# EAGLE board mm_robot_pcb_v3 (EAGLE 9.6.2)
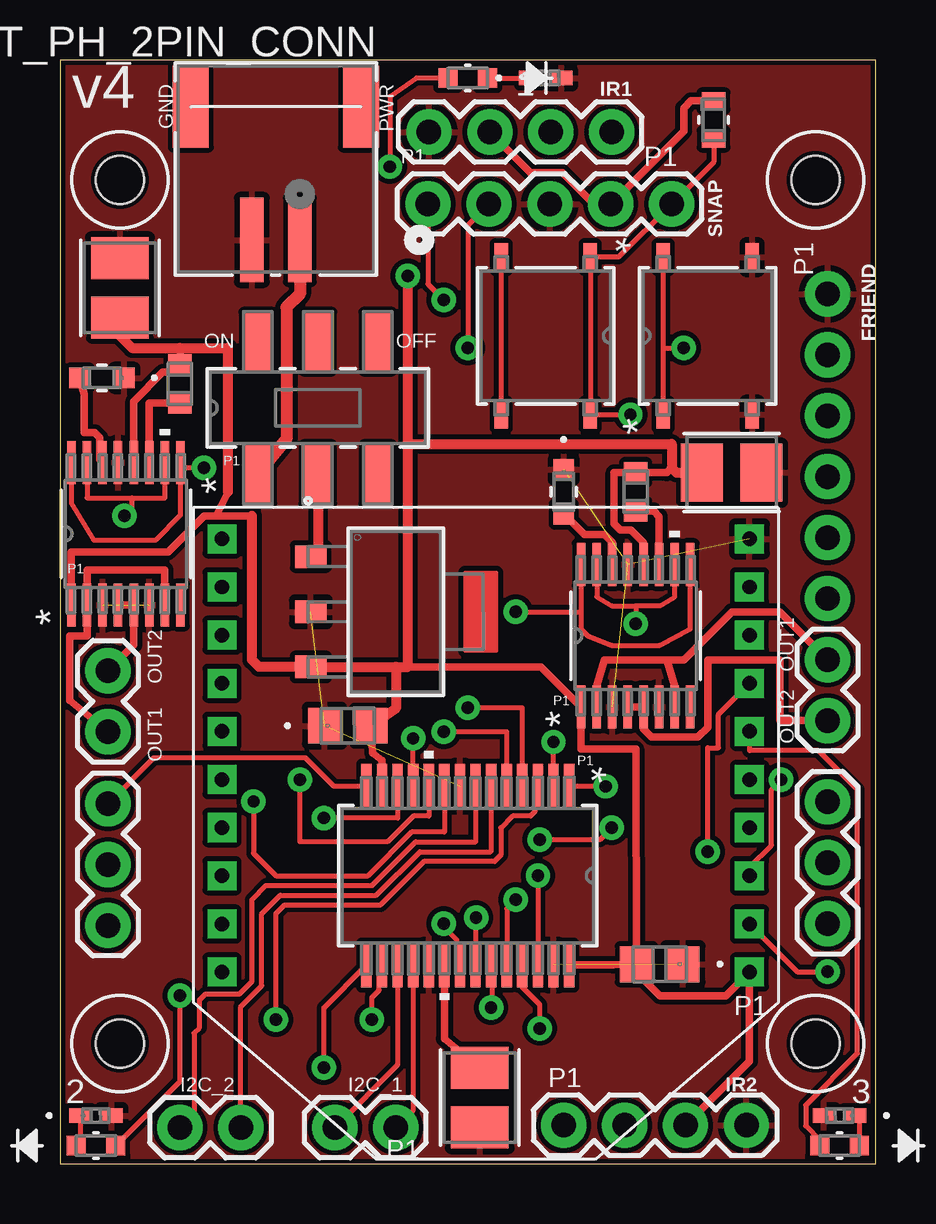
[diagram p0: board, top side]
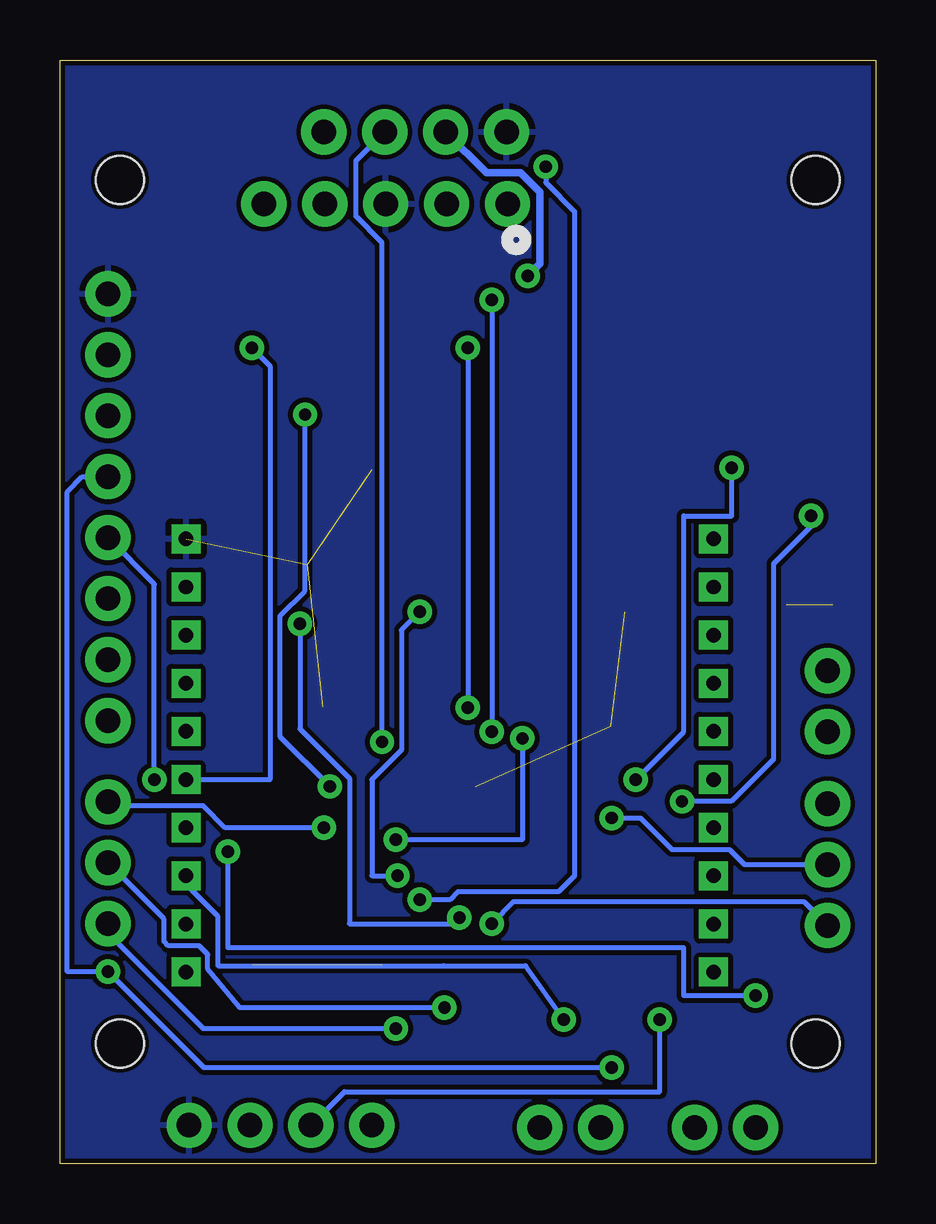
[diagram p1: board, bottom side, seen from below]

Size 34 x 46 mm. Coordinates in mm from the lower left corner, seen from the top.
Outline: 0,0 34,0 34,46 0,46 0,0
Copper layers (1*16): Top 0.035mm / dielectric 1.5mm / Bottom 0.035mm
Design rules "SparkFun": minimum track width 8mil, minimum drill 20mil, track to track 8mil, track to pad 8mil, pad to pad 8mil, via to via 8mil, smd to smd 8mil, copper to edge 8mil, drill to drill 8mil, minimum pad ring 12mil, minimum via ring 10mil, stop-mask expansion 4mil, vias tented up to drill 20mil, thermal gap 10mil
Holes 2 mm at 2.5,5 31.5,5 31.5,41 2.5,41

## Footprints (pad centres in the part's own frame; a part is rotated, then mirrored left to right if it is on the bottom)
CAP_CL10_SAM-M = smd 0.859 x 0.851: 1 -0.929,0; 2 0.929,0
CAP_TPS_B_AVX-M = smd 1.738 x 2.413: 1 -1.239,0; 2 1.239,0
CAP_01UF_0603_X7R_G_AVX = smd 0.864 x 0.965: 1 -0.8,0; 2 0.8,0
CAP_C2012X7R2A104K125AA_TDK-M = smd 1.397 x 1.499: 1 -0.965,0; 2 0.965,0
PW16_TEX-M = smd 1.778 x 0.356: 1 -2.972,2.275; 2 -2.972,1.625; 3 -2.972,0.975; 4 -2.972,0.325; 5 -2.972,-0.325; 6 -2.972,-0.975; 7 -2.972,-1.625; 8 -2.972,-2.275; 9 2.972,-2.275; 10 2.972,-1.625; 11 2.972,-0.975; 12 2.972,-0.325; 13 2.972,0.325; 14 2.972,0.975; 15 2.972,1.625; 16 2.972,2.275
1X06_NO_SILK = drill 1.016 pad 1.88: 1 0,0; 2 2.54,0; 3 5.08,0; 4 7.62,0; 5 10.16,0; 6 12.7,0
1X02 = drill 1.016 pad 1.88: 1 0,0; 2 2.54,0
1X04 = drill 1.016 pad 1.88: 1 0,0; 2 2.54,0; 3 5.08,0; 4 7.62,0
CONN_1769_ADA = smd 0.991 x 3.505: 1 0,0; 2 2,0 | smd 1.499 x 3.404: 3 -2.55,-5.55; 4 4.55,-5.55
LED_APT1608_KNB = smd 0.8 x 0.813: 1 -0.819,0; 2 0.819,0
SMT_FS-M = smd 1.156 x 0.559: 1 -3.283,1.854; 2 3.283,1.854; 3 -3.283,-1.854; 4 3.283,-1.854
1X03 = drill 1.016 pad 1.88: 1 0,0; 2 2.54,0; 3 5.08,0
RES0603_CRG_TYCO_TYC-M = smd 0.711 x 0.991: 1 -0.8,0; 2 0.8,0
RES_CRCW0402_VIS-M = smd 0.914 x 0.61: 1 -0.648,0; 2 0.648,0
1X05 = drill 1.016 pad 1.88: 1 0,0; 2 2.54,0; 3 5.08,0; 4 7.62,0; 5 10.16,0
SW_JS202011SCQN = smd 2.489 x 1.194: 1 -2.756,2.5; 2 -2.756,0; 3 -2.756,-2.5; 4 2.756,-2.5; 5 2.756,0; 6 2.756,2.5
SSOP28_MC_MCH-M = smd 1.867 x 0.432: 1 -3.727,4.225; 2 -3.727,3.575; 3 -3.727,2.925; 4 -3.727,2.275; 5 -3.727,1.625; 6 -3.727,0.975; 7 -3.727,0.325; 8 -3.727,-0.325; 9 -3.727,-0.975; 10 -3.727,-1.625; 11 -3.727,-2.275; 12 -3.727,-2.925; 13 -3.727,-3.575; 14 -3.727,-4.225; 15 3.727,-4.225; 16 3.727,-3.575; 17 3.727,-2.925; 18 3.727,-2.275; 19 3.727,-1.625; 20 3.727,-0.975; 21 3.727,-0.325; 22 3.727,0.325; 23 3.727,0.975; 24 3.727,1.625; 25 3.727,2.275; 26 3.727,2.925; 27 3.727,3.575; 28 3.727,4.225
SOT-223_ST_LIT-M = smd 0.94 x 1.321: 1 -2.299,-3.543; 2 0,-3.543; 3 2.299,-3.543
XB3-24APT-J = drill 0.6 square: 1 -10.998,6.02; 2 -10.998,4.013; 3 -10.998,2.007; 4 -10.998,0; 5 -10.998,-2.007; 6 -10.998,-4.013; 7 -10.998,-6.02; 8 -10.998,-8.026; 9 -10.998,-10.033; 10 -10.998,-12.04; 11 10.998,-12.04; 12 10.998,-10.033; 13 10.998,-8.026; 14 10.998,-6.02; 15 10.998,-4.013; 16 10.998,-2.007; 17 10.998,0; 18 10.998,2.007; 19 10.998,4.013; 20 10.998,6.02

## Placement (x,y rotation side)
C1_VINT1  2.2UF_0603  [CAP_CL10_SAM-M]  21,28 270 top
C2_VINT2  2.2UF_0603  [CAP_CL10_SAM-M]  1.75,32.75 180 top
C3_VM1  10UF_1210  [CAP_TPS_B_AVX-M]  28,28.8 0 top
C4_VCP1  0.01UF_0603  [CAP_01UF_0603_X7R_G_AVX]  24,28 90 top
C5_VM2  10UF_1210  [CAP_TPS_B_AVX-M]  2.5,36.5 90 top
C6_VCP2  0.01UF_0603  [CAP_01UF_0603_X7R_G_AVX]  5,32.5 90 top
C8  0.1UF_0805  [CAP_C2012X7R2A104K125AA_TDK-M]  12,18.25 0 top
C9  0.1UF_0805  [CAP_C2012X7R2A104K125AA_TDK-M]  25,8.31 180 top
C10  10UF_1210  [CAP_TPS_B_AVX-M]  17.5,2.75 90 top
DRIVER1  DRV8833PWPW16_TEX-M  [PW16_TEX-M]  24,22 90 top
DRIVER2  DRV8833PWPW16_TEX-M  [PW16_TEX-M]  2.75,26.25 90 top
FRIEND  [1X06_NO_SILK]  32,36.25 270 top
I2C_2  [1X02]  5,1.5 0 top
IR1  GP2Y0A60SZLF  [1X04]  23,43 180 top
IR2  GP2Y0A60SZLF  [1X04]  21,1.6 0 top
JST_PH_2PIN_CONN  1769  [CONN_1769_ADA]  10,38.5 180 top
LED1  APT1608-VN55  [LED_APT1608_KNB]  17,45.25 180 top
LED2  APT1608-VN55  [LED_APT1608_KNB]  1.5,0.75 0 top
LED3  APT1608-VN55  [LED_APT1608_KNB]  32.5,0.75 180 top
MOTOR1  [1X02]  32,21 270 top
MOTOR2  [1X02]  2,18 90 top
PCI-PINS4  [1X02]  14,1.5 180 top
PIC_PB  PUSH_BUTTON  [SMT_FS-M]  20.25,34.5 270 top
PIN-PINS1  455-1750-1-ND  [1X03]  2,15 270 top
PIN-PINS3  455-1750-1-ND  [1X03]  32,10 90 top
R2  10K_0603  [RES0603_CRG_TYCO_TYC-M]  27.25,43.5 90 top
R6  CRCW04021R00FKRES_CRCW0402_VIS-M  [RES_CRCW0402_VIS-M]  20.25,45.25 0 top
R7  CRCW04021R00FKRES_CRCW0402_VIS-M  [RES_CRCW0402_VIS-M]  1.5,2 0 top
R8  CRCW04021R00FKRES_CRCW0402_VIS-M  [RES_CRCW0402_VIS-M]  32.5,2 180 top
SNAP  [1X05]  25.5,40 180 top
SWITCH  JS202011SCQN  [SW_JS202011SCQN]  10.75,31.5 90 top
U1  PIC32  [SSOP28_MC_MCH-M]  17,12 270 top
VOLT_REG  LT1129IST-3.3TRPBFSOT-223_ST_LIT-M  [SOT-223_ST_LIT-M]  14,23 270 top
XBEE_PB  PUSH_BUTTON  [SMT_FS-M]  27,34.5 90 top
XBEE_ROBOT  XB3-24APT-J  [XB3-24APT-J]  17.75,14 180 top

## Library data of the parts
C1_VINT1 C2_VINT2 = micromouse; COPYRIGHT: Copyright (C) 2021 Ultra Librarian. All rights reserved.; MANUFACTURER_PART_NUMBER: CL10A225KP8NNNC; MFR_NAME: Samsung
C3_VM1 C5_VM2 C10 = micromouse; COPYRIGHT: Copyright (C) 2021 Ultra Librarian. All rights reserved.; MANUFACTURER_PART_NUMBER: TPSB106K016R0500; MFR_NAME: AVX Corporation
C4_VCP1 C6_VCP2 I2C_2 IR1 IR2 MOTOR1 MOTOR2 PCI-PINS4 SNAP XBEE_ROBOT = micromouse
C8 C9 = micromouse; COPYRIGHT: Copyright (C) 2021 Ultra Librarian. All rights reserved.; MANUFACTURER_PART_NUMBER: C2012X7R2A104K125AA; MFR_NAME: TDK
DRIVER1 DRIVER2 = DRV8833PW; COPYRIGHT: Copyright (C) 2021 Ultra Librarian. All rights reserved.; MANUFACTURER_PART_NUMBER: DRV8833PW; MFR_NAME: Texas Instruments
FRIEND = micromouse; PROD_ID: CONN-08437
JST_PH_2PIN_CONN = micromouse; COPYRIGHT: Copyright (C) 2021 Ultra Librarian. All rights reserved.; MANUFACTURER_PART_NUMBER: 1769; MFR_NAME: Adafruit Industries
LED1-LED3 = micromouse; COPYRIGHT: Copyright (C) 2021 Ultra Librarian. All rights reserved.; MANUFACTURER_PART_NUMBER: APT1608-VN55; MFR_NAME: Kingbright
PIC_PB XBEE_PB = micromouse; COPYRIGHT: Copyright (C) 2021 Ultra Librarian. All rights reserved.; MANUFACTURER_PART_NUMBER: PTS526 SK15 SMTR2 LFS; MFR_NAME: C&K
PIN-PINS1 PIN-PINS3 = micromouse; PROD_ID: XXX-00000
R2 = micromouse; COPYRIGHT: Copyright (C) 2021 Ultra Librarian. All rights reserved.; MANUFACTURER_PART_NUMBER: CRG0603F10K; MFR_NAME: TE Connectivity
R6-R8 = micromouse; COPYRIGHT: Copyright (C) 2021 Ultra Librarian. All rights reserved.; MANUFACTURER_PART_NUMBER: CRCW04021R00FK; MFR_NAME: Vishay
SWITCH = micromouse; COPYRIGHT: Copyright (C) 2021 Ultra Librarian. All rights reserved.; MANUFACTURER_PART_NUMBER: JS202011SCQN; MFR_NAME: C&K
U1 = micromouse; COPYRIGHT: Copyright (C) 2021 Ultra Librarian. All rights reserved.; MANUFACTURER_PART_NUMBER: PIC32MX170F256B-I/SS; MFR_NAME: Microchip
VOLT_REG = LT1129IST-3.3#TRPBF; COPYRIGHT: Copyright (C) 2021 Ultra Librarian. All rights reserved.; MANUFACTURER_PART_NUMBER: LT1129IST-3.3#TRPBF; MFR_NAME: Analog Devices / Linear Technology

## Nets
AN0: IR1.2 U1.2
AN1: IR2.2 U1.3
GND: C1_VINT1.1 C2_VINT2.1 C3_VM1.2 C5_VM2.2 C8.1 C9.1 C10.1 DRIVER1.3 DRIVER1.6 DRIVER1.13 DRIVER2.3 DRIVER2.6 DRIVER2.13 FRIEND.1 IR1.4 IR2.4 JST_PH_2PIN_CONN.2 R6.2 R7.2 R8.2 SNAP.3 U1.8 U1.19 U1.27 VOLT_REG.2 XBEE_PB.3 XBEE_PB.4 XBEE_ROBOT.10
M1OUT1: DRIVER1.2 DRIVER1.7 MOTOR1.1
M1OUT2: DRIVER1.4 DRIVER1.5 MOTOR1.2
M2OUT1: DRIVER2.2 DRIVER2.7 MOTOR2.1
M2OUT2: DRIVER2.4 DRIVER2.5 MOTOR2.2
MCLR: PIC_PB.1 PIC_PB.2 R2.1 SNAP.1 U1.1
PB_C7: PIC_PB.3 PIC_PB.4
R6: LED1.1 R6.1
R7: LED2.1 R7.1
R8: LED3.1 R8.1
RP12-AN12: PIN-PINS3.2 U1.23
RPA2-OC4: DRIVER2.10 DRIVER2.15 U1.9
RPA3-OC3: DRIVER2.9 DRIVER2.16 U1.10
RPA4: PIN-PINS1.2 U1.12
RPB0-PGD: SNAP.4 U1.4
RPB1-PGC: SNAP.5 U1.5
RPB2-SDA2: I2C_2.2 U1.6
RPB3-SCL2: I2C_2.1 U1.7
RPB4: PIN-PINS3.3 U1.11
RPB5: PIN-PINS1.1 U1.14
RPB6-PICRX-XBEETX: FRIEND.4 U1.15 XBEE_ROBOT.2
RPB7-PICTX-XBEERX: FRIEND.5 U1.16 XBEE_ROBOT.3
RPB8-SCL1: PCI-PINS4.2 U1.17
RPB9-SDA1: PCI-PINS4.1 U1.18
RPB10: PIN-PINS1.3 U1.21
RPB11-OC2: DRIVER1.10 DRIVER1.15 U1.22
RPB13-OC5: LED1.2 U1.24
RPB14: PIN-PINS3.1 U1.25
RPB15-OC1: DRIVER1.9 DRIVER1.16 U1.26
V+: C3_VM1.1 C4_VCP1.2 C5_VM2.1 C6_VCP2.2 C8.2 C9.2 DRIVER1.1 DRIVER1.12 DRIVER2.1 DRIVER2.12 IR1.3 IR2.3 R2.2 SNAP.2 U1.13 U1.28 VOLT_REG.3 XBEE_ROBOT.1
VABT_IN: SWITCH.2 VOLT_REG.1
VBAT_OUT: JST_PH_2PIN_CONN.1 SWITCH.1
VCAP: C10.2 U1.20
VCP1: C4_VCP1.1 DRIVER1.11
VCP2: C6_VCP2.1 DRIVER2.11
VINT1: C1_VINT1.2 DRIVER1.14
VINT2: C2_VINT2.2 DRIVER2.14
XBEE_PWM0: LED3.2 XBEE_ROBOT.6
XBEE_PWM1: LED2.2 XBEE_ROBOT.7
XBEE_RESET: XBEE_PB.1 XBEE_PB.2 XBEE_ROBOT.5

## Tracks (layer width: path | path; a pad name or v marks a point on that pad's centre or on a via)
AN0  (via drill 0.51)
  Top 0.203: U1.2 v20.57,17.57
  Bottom 0.203: IR1.2 21.66,41.8 21.66,39.48 20.57,38.4 v20.57,17.57
AN1  (via drill 0.51)
  Top 0.203: U1.3 19.8,15.6 19.8,14.67 19.62,14.49 18.87,14.49 18.38,14 18.38,12.86 18.12,12.59 15.17,12.59 13.36,10.78 9.36,10.78 9,10.43 v9,6
  Bottom 0.203: IR2.2 22.14,3 9,3 v9,6
GND  (7 unrouted)
  pour Bottom (isolate 0.025): 0,0 34,0 34,46 0,46
  pour Top (isolate 0.025): 0,46 0,0 34,0 34,46
M1OUT1
  Top 0.305: DRIVER1.2 22.38,19.95 22.7,21 25,21 25.3,21 | 25.3,21 25.62,19.95 DRIVER1.7 | MOTOR1.1 30,23 28,23 26,21 25.3,21
M1OUT2
  Top 0.305: DRIVER1.4 DRIVER1.5 24.32,18.11 24.65,17.78 26.6,17.78 27,18.18 27,21 30,21 30,18.46 MOTOR1.2
M2OUT1
  Top 0.305: DRIVER2.7 4.38,24.75 1.12,24.75 DRIVER2.2 1.12,22 0.4,22 0.4,19.3 MOTOR2.1
M2OUT2
  Top 0.305: DRIVER2.4 DRIVER2.5 3.08,21.61 MOTOR2.2
MCLR  (via drill 0.51)
  Top 0.203: R2.1 27.25,41.75 SNAP.1 23.28,37.78 PIC_PB.1 PIC_PB.2 v23.78,31.22 | v22.75,15.72 U1.1
  Bottom 0.203: v23.78,31.22 23.78,23.87 24.81,22.84 24.81,17.78 v22.75,15.72
PB_C7
  Top 0.203: PIC_PB.3 PIC_PB.4
R6
  Top 0.203: LED1.1 R6.1
R7
  Top 0.203: R7.1 0.85,0.92 LED2.1
R8
  Top 0.203: R8.1 33.32,1.83 LED3.1
RP12-AN12  (via drill 0.51)
  Top 0.203: U1.23 18,8.25 18,6.79 v17.98,6.5
  Bottom 0.203: PIN-PINS3.2 29.66,10.2 29.66,9.26 29.48,9.08 28.2,9.08 27.84,8.71 27.84,8.11 26.5,6.5 v17.98,6.5
RPA2-OC4  (via drill 0.51)
  Top 0.203: DRIVER2.15 1.12,27.75 3,27.75 | 3,27.75 4.38,27.75 DRIVER2.10 | U1.9 16.02,13.81 14.66,13.81 12.85,12 9,12 8.07,12.93 v8.07,15.1 | v2.69,27 3,27.31 3,27.75
  Bottom 0.203: v2.69,27 2.69,26.56 4.25,25.01 4.25,16.87 6.02,15.1 v8.07,15.1
RPA3-OC3  (via drill 0.51)
  Top 0.203: DRIVER2.16 0.47,27.52 1.4,26 4,26 5.03,27.02 5.03,29 | 5.03,29 DRIVER2.9 | U1.10 15.38,14.49 14.74,14.49 13.66,13.41 10,13.41 v10,16 | v6,29 5.03,29
  Bottom 0.203: v10,16 8,18 8,27 6,27 v6,29
RPA4  (via drill 0.51)
  Top 0.203: U1.12 14.07,14.4 v11,14.4
  Bottom 0.203: v11,14.4 9.79,14.4 8.48,13.09 6.09,13.09 5.46,12.46 PIN-PINS1.2
RPB0-PGD  (via drill 0.51)
  Top 0.203: SNAP.4 17,39.12 v17,34 | U1.4 19.27,19 v17,19
  Bottom 0.203: v17,34 v17,19
RPB1-PGC  (via drill 0.51)
  Top 0.203: SNAP.5 15.34,36.66 v16,36 | U1.5 18.62,18 v16,18
  Bottom 0.203: v16,36 v16,18
RPB2-SDA2
  Top 0.203: U1.6 17.98,13.03 17.95,13 15,13 13.19,11.19 9.19,11.19 8.41,10.41 8.41,7.41 7.54,6.54 I2C_2.2
RPB3-SCL2
  Top 0.203: U1.7 17.32,13.41 14.83,13.41 13.02,11.59 8.59,11.59 8,11 8,7.59 7.48,7.07 6.07,7.07 5.81,6.81 5.81,5.66 5.59,5.44 5.59,2.09 I2C_2.1
RPB4  (via drill 0.51)
  Top 0.203: U1.11 v14.72,17.73 | v23,14 22.5,13.5 v20,13.5
  Bottom 0.203: v14.72,17.73 14.72,13.5 v20,13.5 | v23,14 27.11,14 28.02,14.91 31.83,14.91 PIN-PINS3.3
RPB5
  Top 0.203: U1.14 11.42,15.73 10.23,16.92 3.92,16.92 PIN-PINS1.1
RPB6-PICRX-XBEETX  (via drill 0.51)
  Top 0.203: XBEE_ROBOT.2 30.73,8 v32,8 | v11,4 11,6.5 U1.15
  Bottom 0.203: FRIEND.4 33.06,28.63 33.7,28 33.7,8 v32,8 28,4 v11,4
RPB7-PICTX-XBEERX  (via drill 0.51)
  Top 0.203: v30.06,16 29.66,15.59 29.66,13.27 28.75,12.36 XBEE_ROBOT.3 | U1.16 13.31,8.16 13.31,7.23 13,6.92 v13,6
  Bottom 0.203: v30.06,16 30.06,24.15 FRIEND.5 | XBEE_ROBOT.3 28.75,11.64 27.41,10.3 27.41,8.25 18,8.25 14.59,8.25 v13,6
RPB8-SCL1
  Top 0.203: U1.17 14.07,4.12 PCI-PINS4.2
RPB9-SDA1
  Top 0.203: U1.18 14.72,2.23 PCI-PINS4.1
RPB10  (via drill 0.51)
  Top 0.203: U1.21 16.55,8.4 16.55,9.33 16,9.88 v16,10
  Bottom 0.203: v16,10 15.08,10.92 3,10.92 PIN-PINS1.3
RPB11-OC2  (via drill 0.51)
  Top 0.203: DRIVER1.15 22.38,23.62 23,23.25 24,23.25 | 24,23.25 25,23.25 25.62,23.62 DRIVER1.10 | 24,23.25 v24,22.5 | v17.35,10.25 17.32,10.29 U1.22
  Bottom 0.203: v24,22.5 24,18.12 21.94,16.06 21.94,10 17.6,10 v17.35,10.25
RPB13-OC5  (via drill 0.51)
  Top 0.203: LED1.2 14.86,45.24 13.75,44.48 v13.75,41.55 | v19,11 18.62,10.62 U1.24
  Bottom 0.203: v13.75,41.55 13.75,40.89 12.54,39.68 12.54,12 13.22,11.33 17.42,11.33 17.75,11 v19,11
RPB14  (via drill 0.51)
  Top 0.203: v20,5.63 20,6.62 19.27,7.34 U1.25
  Bottom 0.203: PIN-PINS3.1 32,9.59 28.04,5.63 v20,5.63
RPB15-OC1  (via drill 0.51)
  Top 0.203: DRIVER1.16 21.73,23 | 21.73,23 21.73,22.27 22,22 23,21.6 25,21.6 26.27,22.27 DRIVER1.9 | v19.93,12 | v19.93,12 U1.26 | v19,23 21.73,23
  Bottom 0.203: v19,23 19.76,22.24 19.76,17.24 21,16 21,12 v19.93,12
V+  (via drill 0.51)
  Top 0.305: 8,27 6.5,27 | DRIVER2.1 0.47,25.5 4.51,25.5 6,27 6.5,27 | 6.5,27 7,28 | DRIVER1.12 24.32,25.89 23.8,26.41 23.37,26.41 23.1,26.68 23.1,28.8 C4_VCP1.2 | 14,20.7 14.5,20.7 20.05,20.7 DRIVER1.1 21.73,17.27 24,17.27 C9.2 | U1.13 13.43,16.81 13.04,17.12 C8.2 | C9.2 23.07,8.27 U1.28 | C9.2 24.04,7.96 25,7 27.77,7 XBEE_ROBOT.1 28.75,4.27 IR2.3 | IR1.3 19.62,41.3 20.96,41.3 22.25,40 SNAP.2 26,43.04 26,44 26.3,44.3 R2.2 | 5,34 C6_VCP2.2 4.68,32.98 4.29,32.98 3.08,31.77 DRIVER2.12 | C4_VCP1.2 | 25.5,29 25.3,28.8 C4_VCP1.2 | C3_VM1.1
  Top 0.406: 8,27 8,21 8.3,20.7 VOLT_REG.3 14.5,20.7 14.5,30 | 7,28 7,34 5,34 3,34 2.5,34.5 C5_VM2.1 | 14.5,30 v14.5,37 | 14.5,30 25.5,30 25.5,29 25.7,28.8 C3_VM1.1 | 14,20.7 14,18.98 C8.2
  Bottom 0.305: IR1.3 16.21,41.3 14.8,41.3 14,40.49 14,37.5 v14.5,37
VABT_IN
  Top 0.406: SWITCH.2 10.75,25.59 VOLT_REG.1
VBAT_OUT
  Top 0.508: JST_PH_2PIN_CONN.1 10,36.24 9.45,35.69 9.45,30.19 SWITCH.1
VCAP
  Top 0.305: U1.20 16.02,5.2 C10.2
VCP1
  Top 0.305: C4_VCP1.1 24.75,27.2 24.98,26.98 DRIVER1.11
VCP2
  Top 0.305: C6_VCP2.1 3.73,31.7 DRIVER2.11
VINT1
  Top 0.305: C1_VINT1.2 21.85,26.22 22.7,26.22 23.02,25.89 DRIVER1.14
VINT2
  Top 0.305: C2_VINT2.2 1,32.07 1,30.47 1.45,30.47 1.66,30.26 1.66,29.34 DRIVER2.14
XBEE_PWM0
  Top 0.203: LED3.2 31.68,0.98 31.09,1.57 31.09,2.43 33.24,4.58 33.24,15.6 31.62,17.21 28.75,17.21 XBEE_ROBOT.6
XBEE_PWM1  (via drill 0.51)
  Top 0.203: LED2.2 5,3.43 v5,7 | v27,13 27,17.33 27.46,17.33 27.46,18.73 XBEE_ROBOT.7
  Bottom 0.203: v27,13 27,9 8,9 8,7 v5,7
XBEE_RESET  (via drill 0.51)
  Top 0.203: XBEE_PB.2 25.15,34 | 25.15,34 XBEE_PB.1 | 25.15,34 v26,34
  Bottom 0.203: XBEE_ROBOT.5 25.25,16.01 25.25,33.25 v26,34

## Text on the board
tPlace: GND | PWR | v4 | 1 | IR1 | P1 | P1 | P1 | ON | OFF | P1 | P1 | OUT2 | P1 | OUT1 | OUT2 | OUT1 | P1 | P1 | P1 | 2 | 3 | P1
tNames: I2C_2 | I2C_1